# Altium PCB Weekdays.PcbDoc
Units mm, origin at the board's own origin, x right, y up, seen from the top; angles counter-clockwise.
Board outline 103.5 x 8 mm, 2 copper layers (Top Layer, Bottom Layer); 14 components, 10 nets, 47 pads, 15 vias.
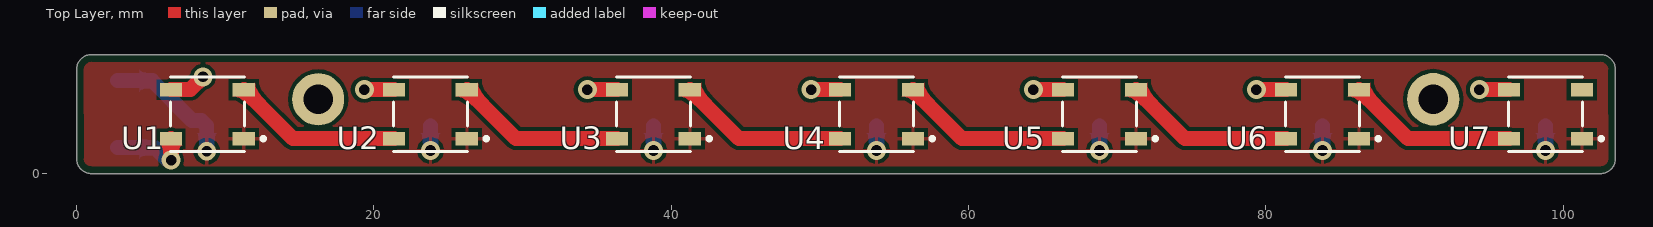
[diagram p0: Top Layer view]
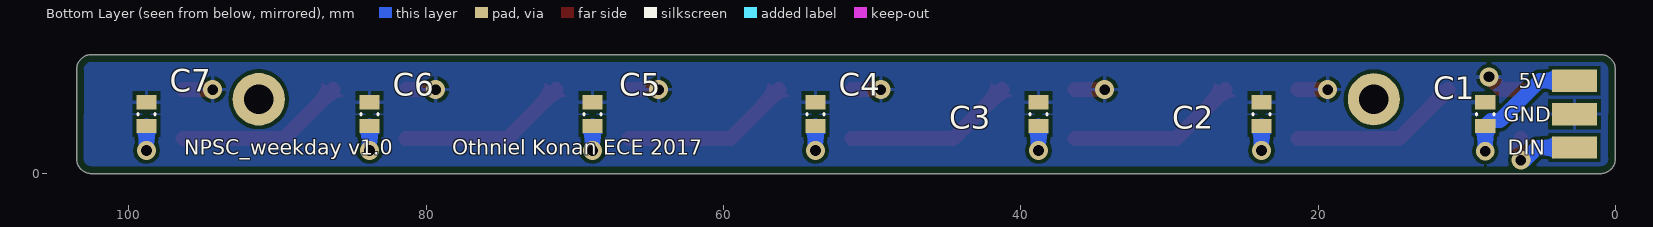
[diagram p1: Bottom Layer view, seen from below]
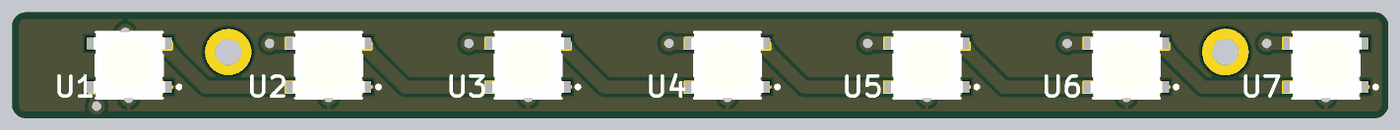
[diagram p2: 3D render of the assembled board from above, using the file's embedded part models]

## Layer stack, top to bottom
Top Solder: solder mask 0.0102, Solder Resist, Dk 3.5
Top Layer: signal copper 0.0356
Dielectric 1: dielectric 0.32, FR-4, Dk 4.8
Bottom Layer: signal copper 0.0356
Bottom Solder: solder mask 0.0102, Solder Resist, Dk 3.5

## Board outline
1,0 cw(c1,1) 0,1 0,7 cw(c1,7) 1,8 102.5,8 cw(c102.5,7) 103.5,7 103.5,1 cw(c102.5,1) 102.5,0

## Design rules (kind name [scope] priority, off if disabled: settings)
Clearance [All] p1: gap=0.254
MinimumSolderMaskSliver [All] p1: minsoldermaskwidth=0.125
PolygonConnect [All] p1: connectstyle=Relief reliefconductorwidth=0.254 reliefentries=4 polygonreliefangle="90 Angle" airgapwidth=0.254
RoomDefinition Weekday [InComponentClass('Weekday')] p1: confinementstyle=ConfineIn formatcopy=TRUE lockcomponents=FALSE outline -6.2,-4.15 109.8,-4.15 109.8,13.85 -6.2,13.85
RoutingVias [All] p1: holewidth=0.711 width=1.27 viastyle="Through Hole" minholewidth=0.711 minwidth=1.27 maxholewidth=0.711 maxwidth=1.27
SilkToSolderMaskClearance [IsPad] p1: minsilkscreentomaskgap=0.125 clearancetoexposedcopper=TRUE
SolderMaskExpansion [All] p1: expansion=0.102
Width [All] p1: maxlimit=3 minlimit=0.5 preferedwidth=1
28 further rules are at their usual default settings.

## Components (designator, comment, footprint, x,y, rotation, side; value= is the part's Value field where it differs from the comment)
C1 "CAP 0.5pF 10V 0805(2012)" CAPC0805(2012)100_L 8.75,4 r270 bottom
C2 "CAP 0.5pF 10V 0805(2012)" CAPC0805(2012)100_L 23.8,4 r270 bottom
C3 "CAP 0.5pF 10V 0805(2012)" CAPC0805(2012)100_L 38.8,4 r270 bottom
C4 "CAP 0.5pF 10V 0805(2012)" CAPC0805(2012)100_L 53.8,4 r270 bottom
C5 "CAP 0.5pF 10V 0805(2012)" CAPC0805(2012)100_L 68.8,4 r270 bottom
C6 "CAP 0.5pF 10V 0805(2012)" CAPC0805(2012)100_L 83.8,4 r270 bottom
C7 "CAP 0.5pF 10V 0805(2012)" CAPC0805(2012)100_L 98.8,4 r270 bottom
U1 "WS2812B" ADAI-WS2812B_V 8.8,4 r180 top
U2 "WS2812B" ADAI-WS2812B_V 23.8,4 r180 top
U3 "WS2812B" ADAI-WS2812B_V 38.8,4 r180 top
U4 "WS2812B" ADAI-WS2812B_V 53.8,4 r180 top
U5 "WS2812B" ADAI-WS2812B_V 68.8,4 r180 top
U6 "WS2812B" ADAI-WS2812B_V 83.8,4 r180 top
U7 "WS2812B" ADAI-WS2812B_V 98.8,4 r180 top

## Footprints (in the part's own frame and the unit in brackets; to place one, negate y for a bottom-side part, rotate by r counter-clockwise, add the part's x,y. Pads: shape width x height; smd on the part's side, far side on the other; paste and mask are expansions set on the pad)
ADAI-WS2812B_V [mm] "SMD, 4-Leads, Body 5x5mm, Pitch 3.3mm"
  rect 1.5x0.9 smd: 1(-2.45,1.65) 2(-2.45,-1.65) 3(2.45,-1.65) 4(2.45,1.65)
  silkscreen extent -3.88,-2.5 2.5,2.5, body extent -2.7,-2.5 2.7,2.5, height 1.69
CAPC0805(2012)100_L [mm] "Chip Capacitor, Body 2.0x1.2mm, Height 1.0mm, IPC High Density"
  rect 0.95x1.35 smd: 1(-0.8,0) 2(0.8,0)
  silkscreen extent -0.05,-0.58 0.05,0.58, body extent -1.1,-0.72 1.1,0.72, height 1

## Part data
C1 C2 C3 C4 C5 C6 C7: library part CMP-1036-00005-1, "CAP 0.5pF 10V ±0.5pF 0805 (2012 Metric) Thickness 1mm SMD"
U1 U2 U3 U4 U5 U6 U7: library part CMP-1740-00005-1, "Intelligent Control LED Integrated Light Source, 3.5 to 5.3 V, -25 to 80 degC, 4-Pin SMD, RoHS, Bulk"

## Free pads (board coordinates)
  rect 3x1.5 smd far side: 1(2.75,6.25) 2(2.75,4) 3(2.75,1.75)
  round 3.5 hole 2: 1(16.25,5)
  oval 3.5x3.54 hole 2: 1(91.25,5)

## Via types
v1: diameter 1.27, hole 0.711, Top Layer to Bottom Layer, tented both sides, 15 vias

## Nets (pads, with @x,y where several pads share a name; then routed paths per layer and width w, separated by ;. In a path a pad name is that pad's centre, name@x,y a point inside that pad or via, vN(x,y) a via of type N, cw(c..) or ccw(c..) an arc to the next point about the centre after c; other vN are vias at no path point)
5V: C1.2 C2.2 C3.2 C4.2 C5.2 C6.2 C7.2 pad.1@2.75,6.25 U1.1 U2.1 U3.1 U4.1 U5.1 U6.1 U7.1 | length 18.9
  Top Layer w1: v1@38.75,1.5 v1(38.8,1.55)
  Bottom Layer w1: pad.1@2.75,6.25 5.084,6.25 7.763,3.571 8.379,3.571 C1.2 v1(8.75,1.5) ; v1(23.8,1.55) C2.2 ; v1(38.8,1.55) C3.2 ; v1(53.8,1.55) C4.2 ; v1(68.8,1.55) C5.2 ; v1(83.8,1.55) C6.2 ; v1(98.8,1.55) C7.2
Din: pad.3 U1.4 | length 5.4
  Top Layer w1: v1(6.35,0.9) U1.4
  Bottom Layer w1: pad.3 5.25,1.75 6.1,0.9 v1(6.35,0.9)
Dout: U7.2
GND: C1.1 C2.1 C3.1 C4.1 C5.1 C6.1 C7.1 pad.2 U1.3 U2.3 U3.3 U4.3 U5.3 U6.3 U7.3 | length 14.5
  Top Layer w1: U1.3 7.65,5.65 v1(8.5,6.5) ; v1(19.35,5.65) U2.3 ; v1(34.35,5.65) U3.3 ; v1(49.4,5.65) U4.3 ; v1(64.35,5.65) U5.3 ; v1(79.35,5.65) U6.3 ; v1(94.35,5.65) U7.3
NetU1_2: U1.2 U2.4 | length 11.5
  Top Layer w1: U1.2 14.55,2.35 U2.4
NetU2_2: U2.2 U3.4 | length 11.5
  Top Layer w1: U2.2 29.55,2.35 U3.4
NetU3_2: U3.2 U4.4 | length 11.5
  Top Layer w1: U3.2 44.55,2.35 U4.4
NetU4_2: U4.2 U5.4 | length 11.5
  Top Layer w1: U4.2 59.55,2.35 U5.4
NetU5_2: U5.2 U6.4 | length 11.5
  Top Layer w1: U5.2 74.55,2.35 U6.4
NetU6_2: U6.2 U7.4 | length 11.5
  Top Layer w1: U6.2 89.55,2.35 U7.4

## Polygon pours and split planes (outlines as drawn)
GND on Bottom Layer "Top Layer-No Net1" (solid, remove dead copper, pour order 14): 1,0.5 cw(c1,1) 0.5,1 0.5,7 cw(c1,7) 1,7.5 102.5,7.5 cw(c102.5,7) 103,7 103,1 cw(c102.5,1) 102.5,0.5
5V on Top Layer "Top Layer-No Net" (solid, remove dead copper, pour order 17): 1,0.5 cw(c1,1) 0.5,1 0.5,7 cw(c1,7) 1,7.5 102.5,7.5 cw(c102.5,7) 103,7 103,1 cw(c102.5,1) 102.5,0.5

## Silkscreen, mask and mechanical layers (free items; w line width, h text height)
Bottom Overlay:
  text "5V" at 6.5,5.75 h1
  text "GND" at 7.5,3.5 h1
  text "DIN" at 7.25,1.25 h1
  text "Othniel Konan ECE 2017" at 78.25,1.25 h1
  text "NPSC_weekday v1.0" at 96.25,1.25 h1
Mechanical 1:
  the board outline again, w0.254

## Panel: embedded boards
"Weekdays.PcbDoc" at -1.75,10, 1 rows x 1 columns, spacing 0 x 0, rotation 0
"Weekdays.PcbDoc" at 21.5,-3.75, 1 rows x 1 columns, spacing 0 x 0, rotation 0